# EAGLE board ESP32 Display 3.5 inch V1.2 (EAGLE 9.6.2), part 1 of 2
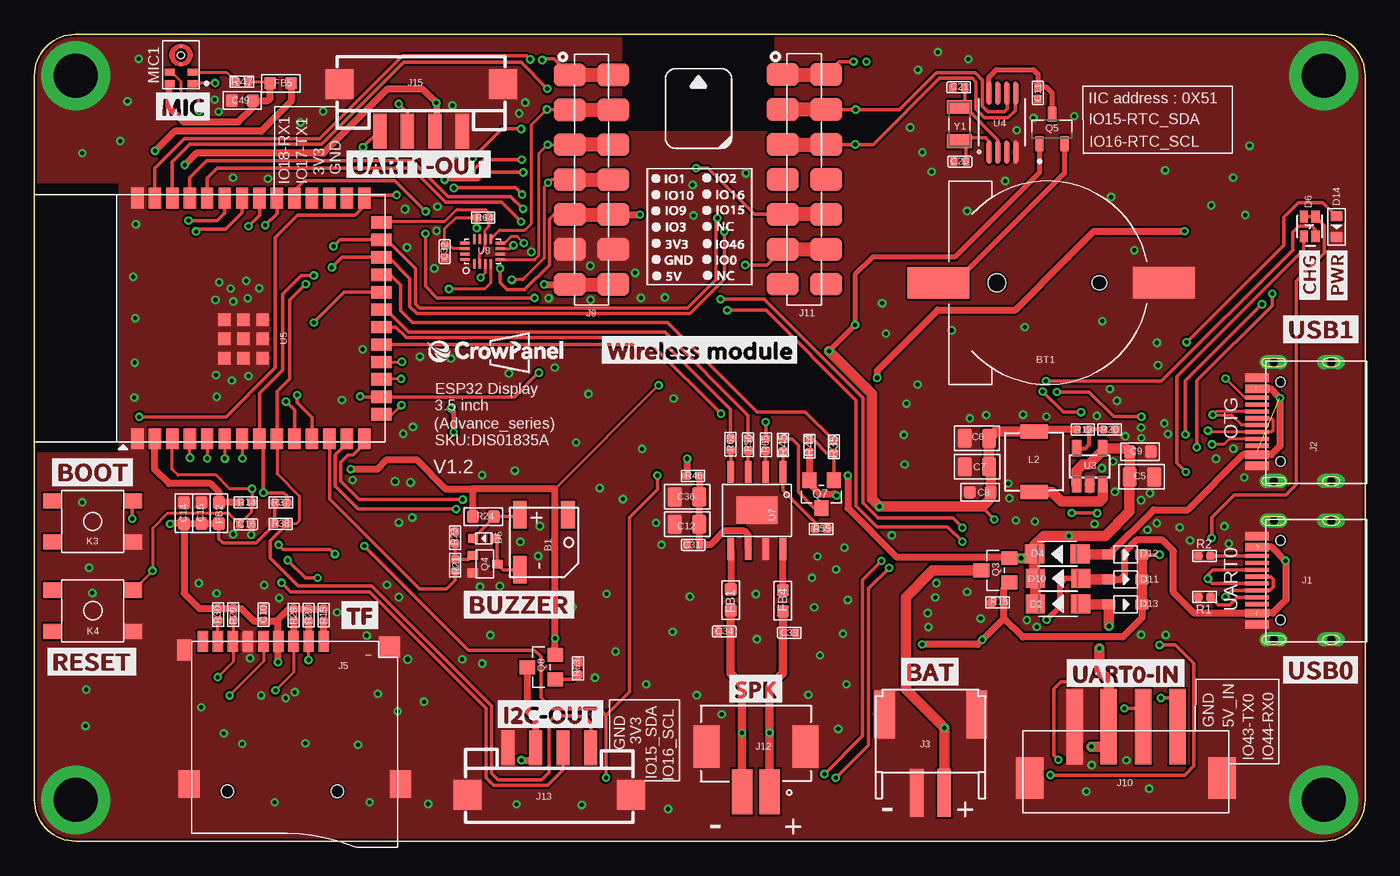
[diagram p0: board, top side]
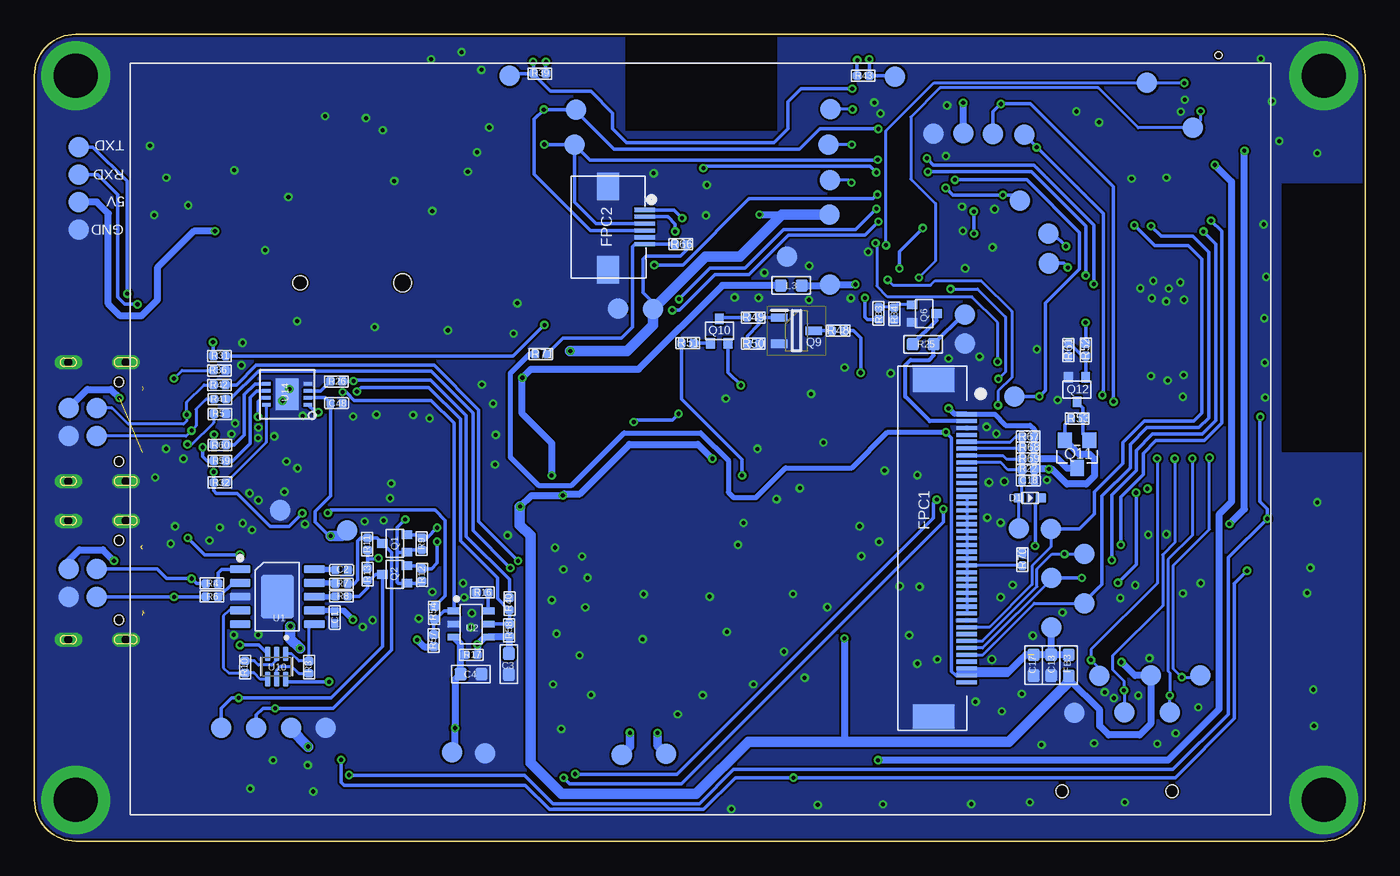
[diagram p1: board, bottom side, seen from below]

Size 96.8 x 58.7 mm. Coordinates in mm from the lower left corner, seen from the top.
Outline: 0,55.7 0,3 arc90 3,0 93.8,0 arc90 96.8,3 96.8,55.7 arc90 93.8,58.7 3,58.7 arc90 0,55.7
Copper layers (1*16): Top 0.035mm / dielectric 1.5mm / Bottom 0.035mm
Design rules "HMI_GZ *": minimum track width 8mil, minimum drill 0.3mm, track to track 6mil, track to pad 6mil, pad to pad 4mil, via to via 6mil, smd to smd 6mil, copper to edge 6mil, drill to drill 4mil, minimum pad ring 6mil, minimum via ring 6mil, stop-mask expansion 4mil, vias tented up to drill 100mil, thermal gap 0mil
tRestrict: area 0,28.3 to 6.1,47.8; area 42.8,51.7 to 53.8,58.7
bRestrict: area 0,28.3 to 6.1,47.8; area 42.8,51.7 to 53.8,58.7

## Footprints (pad centres in the part's own frame; a part is rotated, then mirrored left to right if it is on the bottom)
BEEP_5025 = smd 2 x 1: 1 -2,-1.75; 2 2,-1.75; 3 -2,1.75
CR1220 = smd 2.3 x 4.5: N 0,8.425; P 0,-7.975 | hole 1.3: 0,-3.725 | hole 1.05: 0,3.725
C0402 = smd 0.6 x 0.6: 1 -0.45,0; 2 0.45,0
C0603 = smd 0.889 x 0.889: 1 -0.762,0; 2 0.762,0
C0805 = smd 1.016 x 1.397: 1 -0.889,0; 2 0.889,0
D_SOD523 = smd 0.762 x 0.7: + -0.8,0; - 0.8,0
D_SOD123FL = smd 1.397 x 1.397: + -1.651,0; - 1.651,0
LED_KT-0603RYG = smd 0.85 x 0.6: 1 0.725,-0.425; 2 0.725,0.425; 3 -0.725,-0.425; 4 -0.725,0.425
D_SOD323 = smd 1 x 0.8: + -1.2,0; - 1.2,0
LED0603 = smd 0.762 x 0.889: + -0.762,0; - 0.762,0
L0603 = smd 0.889 x 0.889: 1 -0.762,0; 2 0.762,0
COOPER_0.5MM*40P = smd 0.3 x 1.5: P$1 -8.81,1.73; P$2 -8.31,1.73; P$3 -7.81,1.73; P$4 -7.31,1.73; P$5 -6.81,1.73; P$6 -6.31,1.73; P$7 -5.81,1.73; P$8 -5.31,1.73; P$9 -4.81,1.73; P$10 -4.31,1.73; P$11 -3.81,1.73; P$12 -3.31,1.73; P$13 -2.81,1.73; P$14 -2.31,1.73; P$15 -1.81,1.73; P$16 -1.31,1.73; P$17 -0.81,1.73; P$18 -0.31,1.73; P$19 0.19,1.73; P$20 0.69,1.73; P$21 1.19,1.73; P$22 1.69,1.73; P$23 2.19,1.73; P$24 2.69,1.73; P$25 3.19,1.73; P$26 3.69,1.73; P$27 4.19,1.73; P$28 4.69,1.73; P$29 5.19,1.73; P$30 5.69,1.73; P$31 6.19,1.73; P$32 6.69,1.73; P$33 7.19,1.73; P$34 7.69,1.73; P$35 8.19,1.73; P$36 8.69,1.73; P$37 9.19,1.73; P$38 9.69,1.73; P$39 10.19,1.73; P$40 10.69,1.73 | smd 1.8 x 3: P$41 -11.31,-0.67; P$42 13.19,-0.67
FPC-6PIN-0.5MM = smd 0.3 x 1.5: 1 -1.31,2.184; 2 -0.81,2.184; 3 -0.31,2.184; 4 0.19,2.184; 5 0.69,2.184; 6 1.19,2.184 | smd 2 x 1.6: 7 -3.01,-0.496; 8 3.036,-0.496
USB-3.0TYPEC-SMD = smd 0.3 x 1.7: A1 -3.35,0.5; A4 -2.55,0.5; A5 -1.25,0.5; A6 -0.25,0.5; A7 0.25,0.5; A8 1.25,0.5; A9 2.55,0.5; A12 3.35,0.5; B1 3.05,0.5; B4 2.25,0.5; B5 1.75,0.5; B6 0.75,0.5; B7 -0.75,0.5; B8 -1.75,0.5; B9 -2.25,0.5; B12 -3.05,0.5 | drill 0.6 pad 1.016 long: P$1 -4.325,-0.72; P$2 4.325,-0.72; P$3 -4.325,-4.9; P$4 4.325,-4.9 | hole 0.68: -2.89,-1.22; 2.89,-1.22
PH2.0WT-2PIN = smd 1 x 3.5: P$1 -1,0; P$2 1,0 | smd 1.5 x 3.5: P$3 -3.35,-5.7; P$4 3.35,-5.7
THO-M3.2*5MM-HOLE = drill 3.2 pad 5: P$1 0,0
9P-SMD-W/-RING = smd 1.524 x 0.762: 1 0,4.4; 2 0,3.3; 3 0,2.2; 4 0,1.1; 5 0,0; 6 0,-1.1; 7 0,-2.2; 8 0,-3.3; 9 0,-4.4 | smd 1.524 x 1.016: G1 0.6,-5.746 | smd 2.032 x 1.524: G2 10.373,-5.4; G3 10.373,10 | smd 1.524 x 1.524: G4 0.392,9.181 | hole 0.889: 10.9,-2.6; 10.9,5.4
H7-2.54-18.28X2.5X5MM = smd 1.65 x 2.3: 1 -7.62,-1.58; 1-1 -7.62,1.58; 2 -5.08,-1.58; 2-2 -5.08,1.58; 3 -2.54,-1.58; 3-3 -2.54,1.58; 4 0,-1.58; 4-4 0,1.58; 5 2.54,-1.58; 5-5 2.54,1.58; 6 5.08,-1.58; 6-6 5.08,1.58; 7 7.62,-1.58; 7-7 7.62,1.58
XH2.54-4P-SMD = smd 1.2 x 5.5: 1 -3.75,-1.875; 2 -1.25,-1.875; 3 1.25,-1.875; 4 3.75,-1.875 | smd 2 x 3: 5 -7,1.875; 6 7,1.875
CONN-TH_2P-P2.00_XUNPU_WAFER-PH2.0-2PLB = smd 1.5 x 3.3: 1 -1,1.65; 2 1,1.65 | smd 1.9 x 3.1: 3 3.6,-1.65; 4 -3.6,-1.65
CONNECTOR_4P-SMD-2.0 = smd 0.965 x 2.54: 1 -3,0; 2 -1,0; 3 1,0; 4 3,0 | smd 2.032 x 2.184: SS1 -5.946,3.4; SS2 5.946,3.4
TEST-PIN-4-2.0MM = smd 1.5 x 1.5: 1 -3,0; 2 -1,0; 3 1,0; 4 3,0
KEY-4.5X4.5-SMD = smd 1.35 x 1.1: 1 -2.925,1.5; 2 -2.925,-1.5; 3 2.925,-1.5; 4 2.925,1.5
L0420 = smd 2 x 1: 1 0,2.2; 2 0,-2.2
MIC-SMD_5P-L3.5-W2.7-P1.67 = smd 0.725 x 0.522: 1 -0.838,1.362; 2 -0.838,0.542; 3 0.838,0.542; 4 0.838,1.362 | smd 0.25 x 0.25: 5_1 0,-0.048; 5_2 0,-1.373 | hole 0.5: 0,-0.71
TEST_PAD-1.5MM = smd 1.5 x 1.5: P$1 0,0
MOS_SOT323 = smd 0.635 x 0.762: 1 -0.635,-0.889; 2 0.635,-0.889; 3 0,0.889
PMOS_SOT23 = smd 1.016 x 1.143: 1 -0.889,-1.016; 2 0.889,-1.016; 3 0,1.016
SOT-23 = smd 1.09 x 0.61: 1 -1.07,0.915; 2 -1.07,-0.915; 3 1.07,0
SOT95P280X125-3N = smd 1.2 x 0.6: 1 -1.25,0.95; 2 -1.25,-0.95; 3 1.25,0
R0402 = smd 0.635 x 0.635: 1 -0.445,0; 2 0.445,0
R0603-SP = smd 0.889 x 0.889: 1 -0.762,0; 2 0.762,0
ESOP-10-EP-150MIL = smd 1.5 x 0.6: 1 -2.7,2; 2 -2.7,1; 3 -2.7,0; 4 -2.7,-1; 5 -2.7,-2; 6 2.7,-2; 7 2.7,-1; 8 2.7,0; 9 2.7,1; 10 2.7,2 | smd 2.4 x 3.2: EP 0,0
SOT23-6L = smd 0.5 x 0.9: 1 -0.961,-1.212; 2 -0.011,-1.212; 3 0.94,-1.212; 4 0.94,1.288; 5 -0.011,1.288; 6 -0.961,1.288
IC_SOT23-5 = smd 0.69 x 1.2: 1 -0.95,-1.3; 2 0,-1.3; 3 0.95,-1.3; 4 0.95,1.3; 5 -0.95,1.3
MSOP-8 = smd 0.364 x 1.692: 1 -0.975,-2.146; 2 -0.325,-2.146; 3 0.325,-2.146; 4 0.975,-2.146; 5 0.975,2.146; 6 0.325,2.146; 7 -0.325,2.146; 8 -0.975,2.146
ESP32-S3-WROOM-1-SMD41 = smd 1.5 x 0.9: 1 -8.75,5.26; 2 -8.75,3.99; 3 -8.75,2.72; 4 -8.75,1.45; 5 -8.75,0.18; 6 -8.75,-1.09; 7 -8.75,-2.36; 8 -8.75,-3.63; 9 -8.75,-4.9; 10 -8.75,-6.17; 11 -8.75,-7.44; 12 -8.75,-8.71; 13 -8.75,-9.98; 14 -8.75,-11.25; 27 8.75,-11.25; 28 8.75,-9.98; 29 8.75,-8.71; 30 8.75,-7.44; 31 8.75,-6.17; 32 8.75,-4.9; 33 8.75,-3.63; 34 8.75,-2.36; 35 8.75,-1.09; 36 8.75,0.18; 37 8.75,1.45; 38 8.75,2.72; 39 8.75,3.99; 40 8.75,5.26 | smd 0.9 x 1.5: 15 -6.985,-12.5; 16 -5.715,-12.5; 17 -4.445,-12.5; 18 -3.175,-12.5; 19 -1.905,-12.5; 20 -0.635,-12.5; 21 0.635,-12.5; 22 1.905,-12.5; 23 3.175,-12.5; 24 4.445,-12.5; 25 5.715,-12.5; 26 6.985,-12.5 | smd 0.9 x 0.9: 41 -2.9,-1.06; 42 -1.5,-1.06; 43 -0.1,-1.06; 44 -2.9,-2.46; 45 -1.5,-2.46; 46 -0.1,-2.46; 47 -2.9,-3.86; 48 -1.5,-3.86; 49 -0.1,-3.86
NS4168-ESOP-8 = smd 1.6 x 0.5: 1 -2.8,1.905; 2 -2.8,0.635; 3 -2.8,-0.635; 4 -2.8,-1.905; 5 2.8,-1.905; 6 2.8,-0.635; 7 2.8,0.635; 8 2.8,1.905 | smd 2 x 3: 9 0,0
IC_SGM3799_TQFN2.6X1.8_16L = smd 0.2 x 0.7: 1 -0.6,-0.9; 2 -0.2,-0.9; 3 0.2,-0.9; 4 0.6,-0.9; 9 0.6,0.9; 10 0.2,0.9; 11 -0.2,0.9; 12 -0.6,0.9 | smd 0.7 x 0.2: 5 1.3,-0.6; 6 1.3,-0.2; 7 1.3,0.2; 8 1.3,0.6; 13 -1.3,0.6; 14 -1.3,0.2; 15 -1.3,-0.2; 16 -1.3,-0.6
SOP65P210X100-6N = smd 1.09 x 0.4: 1 -0.92,0.65; 2 -0.92,0; 3 -0.92,-0.65; 4 0.92,-0.65; 5 0.92,0; 6 0.92,0.65
DFN8 = smd 0.61 x 0.25: 1 -1.5,0.75; 2 -1.5,0.25; 3 -1.5,-0.25; 4 -1.5,-0.75; 5 1.5,-0.75; 6 1.5,-0.25; 7 1.5,0.25; 8 1.5,0.75 | smd 1.7 x 2.3: P$9 0,0
SMD3215-2P = smd 1 x 1.8: 1 -1.25,0; 2 1.25,0

## Placement (x,y rotation side)
B1  BEEP_5025  [BEEP_5025]  37.07,21.74 270 top
BT1  CR1220  [CR1220]  73.73,40.63 270 top
C1  1uF  [C0402]  74.95,16.27 90 bottom
C2  1uF  [C0402]  74.45,19.73 180 bottom
C3  1uF/0603  [C0603]  62.29,12.88 90 bottom
C4  10uF/0603  [C0603]  65.04,12.16 180 bottom
C5  22uF/0805  [C0805]  80.55,26.5 180 top
C6  22uF/0805  [C0805]  68.56,29.31 0 top
C7  22uF/0805  [C0805]  68.57,27.24 0 top
C8  1uF/0603  [C0603]  68.8,25.38 0 top
C9  1uF/0603  [C0603]  80.44,28.33 180 top
C10  1uF  [C0402]  16.67,16.47 270 top
C11  1uF  [C0402]  73,54.43 270 top
C12  47uF/0805  [C0805]  47.48,23.06 180 top
C13  4.7uF  [C0603]  22.84,12.8 90 bottom
C14  10uF/0603  [C0603]  10.88,23.86 270 top
C15  100nF/0603  [C0603]  12.16,23.86 270 top
C16  1uF  [C0402]  15.38,23.06 180 top
C17  100nF  [C0603]  24.11,12.8 90 bottom
C18  1uF  [C0402]  24.5,26.23 180 bottom
C20  18pF  [C0402]  67.32,49.45 0 top
C21  18pF  [C0402]  67.24,54.84 180 top
C31  100nF  [C0402]  47.93,21.57 180 top
C32  1uF  [C0402]  29.85,42.89 90 top
C33  1nF  [C0402]  54.92,15.16 180 top
C34  1nF  [C0402]  50.19,15.25 0 top
C36  47uF/0805  [C0805]  47.48,25.05 180 top
C48  1uF  [C0402]  74.81,31.86 180 bottom
C49  100nF  [C0603]  15.12,53.88 0 top
D1  B5819WT  [D_SOD523]  24.38,24.97 0 bottom
D2  DSS34  [D_SOD123FL]  74.46,17.27 180 top
D4  DSS34  [D_SOD123FL]  74.41,20.89 180 top
D5  B5819WT  [D_SOD523]  32.71,22.03 180 top
D6  KT-0603RYG  [LED_KT-0603RYG]  92.76,44.72 90 top
D10  DSS34  [D_SOD123FL]  74.47,19.11 180 top
D11  1N5817WS  [D_SOD323]  79.37,19.05 0 top
D12  1N5817WS  [D_SOD323]  79.37,20.86 0 top
D13  1N5817WS  [D_SOD323]  79.37,17.22 0 top
D14  Red  [LED0603]  94.73,44.7 270 top
FB1  1K/300mA  [L0603]  50.65,17.55 270 top
FB2  0R/800mA  [L0603]  13.43,23.86 90 top
FB3  0R/800mA  [L0603]  21.56,12.8 90 bottom
FB4  1K/300mA  [L0603]  54.45,17.49 270 top
FB5  0R/800mA  [L0603]  17.92,55.14 180 top
FPC1  3.5-TFT-FPC-40PIN-0.5MM  [COOPER_0.5MM*40P]  30.71,22.25 270 bottom
FPC2  FPC-6PIN-0.5MM  [FPC-6PIN-0.5MM]  54.58,44.62 270 bottom
J1  TYPEC-3.0-16P-SMD  [USB-3.0TYPEC-SMD]  89.43,18.99 90 top
J2  TYPEC-3.0-16P-SMD  [USB-3.0TYPEC-SMD]  89.43,30.52 90 top
J3  PH2.0WT-2PIN  [PH2.0WT-2PIN]  65.18,3.52 180 top
J4  THO-M3.25MM-HOLE  [THO-M3.2*5MM-HOLE]  3,3 0 top
J5  [9P-SMD-W/-RING]  16.65,14.53 270 top
J6  THO-M3.25MM-HOLE  [THO-M3.2*5MM-HOLE]  3,55.7 0 top
J7  THO-M3.25MM-HOLE  [THO-M3.2*5MM-HOLE]  93.8,3 0 top
J8  THO-M3.25MM-HOLE  [THO-M3.2*5MM-HOLE]  93.8,55.7 0 top
J9  [H7-2.54-18.28X2.5X5MM]  40.53,48.13 270 top
J10  XH2.54-4P-SMT  [XH2.54-4P-SMD]  79.4,6.46 180 top
J11  [H7-2.54-18.28X2.5X5MM]  56.01,48.15 270 top
J12  WAFER-PH2.0-2PLB  [CONN-TH_2P-P2.00_XUNPU_WAFER-PH2.0-2PLB]  52.49,5.24 180 top
J13  HY2.0-4P-SMT  [CONNECTOR_4P-SMD-2.0]  37.46,6.79 180 top
J14  HC-PZ200-8.7L-1X4PZ1  [TEST-PIN-4-2.0MM]  93.59,47.5 270 bottom
J15  HY2.0-4P-SMT  [CONNECTOR_4P-SMD-2.0]  28.14,51.66 0 top
K3  KEY-4.5X4.5  [KEY-4.5X4.5-SMD]  4.24,23.26 180 top
K4  KEY-4.5X4.5  [KEY-4.5X4.5-SMD]  4.25,16.76 180 top
L2  4.7uH/3A  [L0420]  72.73,27.61 180 top
L3  NC  [L0603]  41.74,40.43 180 bottom
MIC1  LMD3526B261-OFA01  [MIC-SMD_5P-L3.5-W2.7-P1.67]  10.67,56.48 180 top
P1  TEST_PADPAD-1.5MM  [TEST_PAD-1.5MM]  94.31,19.81 0 bottom
P2  TEST_PADPAD-1.5MM  [TEST_PAD-1.5MM]  92.27,19.81 0 bottom
P3  TEST_PADPAD-1.5MM  [TEST_PAD-1.5MM]  92.27,17.78 0 bottom
P4  TEST_PADPAD-1.5MM  [TEST_PAD-1.5MM]  94.31,17.78 0 bottom
P5  TEST_PADPAD-1.5MM  [TEST_PAD-1.5MM]  94.31,31.51 0 bottom
P6  TEST_PADPAD-1.5MM  [TEST_PAD-1.5MM]  92.27,29.48 0 bottom
P7  TEST_PADPAD-1.5MM  [TEST_PAD-1.5MM]  92.27,31.51 0 bottom
P8  TEST_PADPAD-1.5MM  [TEST_PAD-1.5MM]  94.31,29.48 0 bottom
P9  TEST_PADPAD-1.5MM  [TEST_PAD-1.5MM]  66.42,6.47 0 bottom
P10  TEST_PADPAD-1.5MM  [TEST_PAD-1.5MM]  64.02,6.38 0 bottom
P11  TEST_PADPAD-1.5MM  [TEST_PAD-1.5MM]  74.06,22.6 270 bottom
P12  TEST_PADPAD-1.5MM  [TEST_PAD-1.5MM]  78.92,24.08 270 bottom
P13  TEST_PADPAD-1.5MM  [TEST_PAD-1.5MM]  15.59,12.05 0 bottom
P15  TEST_PADPAD-1.5MM  [TEST_PAD-1.5MM]  19.34,12.04 0 bottom
P16  TEST_PADPAD-1.5MM  [TEST_PAD-1.5MM]  17.51,9.37 0 bottom
P17  TEST_PADPAD-1.5MM  [TEST_PAD-1.5MM]  78.13,8.25 0 bottom
P18  TEST_PADPAD-1.5MM  [TEST_PAD-1.5MM]  75.61,8.25 0 bottom
P19  TEST_PADPAD-1.5MM  [TEST_PAD-1.5MM]  80.65,8.25 0 bottom
P20  TEST_PADPAD-1.5MM  [TEST_PAD-1.5MM]  83.2,8.25 0 bottom
P21  TEST_PADPAD-1.5MM  [TEST_PAD-1.5MM]  38.94,48.09 180 bottom
P22  TEST_PADPAD-1.5MM  [TEST_PAD-1.5MM]  39.03,50.67 180 bottom
P23  TEST_PADPAD-1.5MM  [TEST_PAD-1.5MM]  38.89,53.27 180 bottom
P24  TEST_PADPAD-1.5MM  [TEST_PAD-1.5MM]  15.87,55.17 180 bottom
P25  TEST_PADPAD-1.5MM  [TEST_PAD-1.5MM]  14.21,9.37 0 bottom
P26  TEST_PADPAD-1.5MM  [TEST_PAD-1.5MM]  12,12.05 0 bottom
P27  TEST_PADPAD-1.5MM  [TEST_PAD-1.5MM]  12.52,51.9 180 bottom
P28  TEST_PADPAD-1.5MM  [TEST_PAD-1.5MM]  21.15,9.35 0 bottom
P30  TEST_PADPAD-1.5MM  [TEST_PAD-1.5MM]  54.07,6.27 90 bottom
P31  TEST_PADPAD-1.5MM  [TEST_PAD-1.5MM]  25.1,46.6 180 bottom
P32  TEST_PADPAD-1.5MM  [TEST_PAD-1.5MM]  25.53,32.36 180 bottom
P38  TEST_PADPAD-1.5MM  [TEST_PAD-1.5MM]  51.79,38.73 0 bottom
P39  TEST_PADPAD-1.5MM  [TEST_PAD-1.5MM]  57.51,50.67 0 bottom
P40  TEST_PADPAD-1.5MM  [TEST_PAD-1.5MM]  57.41,53.23 0 bottom
P41  TEST_PADPAD-1.5MM  [TEST_PAD-1.5MM]  54.34,38.75 0 bottom
P42  TEST_PADPAD-1.5MM  [TEST_PAD-1.5MM]  50.85,6.35 90 bottom
P44  TEST_PADPAD-1.5MM  [TEST_PAD-1.5MM]  29.23,51.5 0 bottom
P45  TEST_PADPAD-1.5MM  [TEST_PAD-1.5MM]  31.39,51.47 0 bottom
P46  TEST_PADPAD-1.5MM  [TEST_PAD-1.5MM]  27.06,51.46 0 bottom
P47  TEST_PADPAD-1.5MM  [TEST_PAD-1.5MM]  24.79,51.39 0 bottom
P49  TEST_PADPAD-1.5MM  [TEST_PAD-1.5MM]  25.2,22.74 0 bottom
P50  TEST_PADPAD-1.5MM  [TEST_PAD-1.5MM]  20.43,20.89 180 bottom
P51  TEST_PADPAD-1.5MM  [TEST_PAD-1.5MM]  22.83,19.16 180 bottom
P52  TEST_PADPAD-1.5MM  [TEST_PAD-1.5MM]  20.42,17.3 180 bottom
P53  TEST_PADPAD-1.5MM  [TEST_PAD-1.5MM]  22.86,22.73 180 bottom
P55  TEST_PADPAD-1.5MM  [TEST_PAD-1.5MM]  22.83,15.55 180 bottom
P56  TEST_PADPAD-1.5MM  [TEST_PAD-1.5MM]  29.1,38.31 180 bottom
P57  TEST_PADPAD-1.5MM  [TEST_PAD-1.5MM]  29.11,36.19 0 bottom
P58  TEST_PADPAD-1.5MM  [TEST_PAD-1.5MM]  62.23,55.68 0 bottom
P59  TEST_PADPAD-1.5MM  [TEST_PAD-1.5MM]  34.2,55.62 0 bottom
P60  TEST_PADPAD-1.5MM  [TEST_PAD-1.5MM]  42.06,42.54 0 bottom
P61  TEST_PADPAD-1.5MM  [TEST_PAD-1.5MM]  38.96,45.59 0 bottom
P62  TEST_PADPAD-1.5MM  [TEST_PAD-1.5MM]  38.93,40.5 0 bottom
P63  TEST_PADPAD-1.5MM  [TEST_PAD-1.5MM]  23.02,42.04 0 bottom
P64  TEST_PADPAD-1.5MM  [TEST_PAD-1.5MM]  23.04,44.22 0 bottom
Q1  BSS138W_SOT323  [MOS_SOT323]  70.58,21.66 90 bottom
Q2  BSS138W_SOT323  [MOS_SOT323]  70.58,19.4 90 bottom
Q3  AO3401  [PMOS_SOT23]  69.91,19.7 90 top
Q4  SS8050W-SOT323  [MOS_SOT323]  32.77,20.16 270 top
Q5  BAT54C-7-F  [SOT-23]  74.02,51.81 90 top
Q6  SS8050W-SOT323  [MOS_SOT323]  32.07,38.39 270 bottom
Q7  AO3401  [PMOS_SOT23]  57.26,25.24 180 top
Q8  AO3401  [PMOS_SOT23]  36.87,12.66 90 top
Q9  AO3400A  [SOT95P280X125-3N]  41.36,37.14 0 bottom
Q10  SS8550W-SOT323  [MOS_SOT323]  46.98,37.12 0 bottom
Q11  AO3401//NC  [PMOS_SOT23]  20.95,28.16 180 bottom
Q12  SS8050W-SOT323//NC  [MOS_SOT323]  20.96,32.86 180 bottom
R1  5.1K  [R0402]  85.11,17.76 180 top
R2  5.1K  [R0402]  85.11,20.75 0 top
R3  10K  [R0402]  76.83,12.66 90 bottom
R4  0R  [R0402]  83.89,18.74 180 bottom
R5  5.1K  [R0402]  83.31,31.09 180 bottom
R6  0R  [R0402]  83.89,17.79 180 bottom
R7  0R  [R0402]  74.46,18.73 180 bottom
R8  0R  [R0402]  74.46,17.81 180 bottom
R9  4.7k  [R0402]  68.62,21.63 270 bottom
R10  10K  [R0402]  81.48,12.68 270 bottom
R11  4.7k  [R0402]  72.58,21.62 270 bottom
R12  4.7k  [R0402]  68.61,19.37 270 bottom
R13  4.7k  [R0402]  72.57,19.42 90 bottom
R14  10K  [R0402]  15.37,24.64 180 top
R15  10K  [R0402]  21.04,16.45 90 top
R16  2K  [R0402]  64.21,18.09 0 bottom
R17  5.1K  [R0402]  65.02,13.55 0 bottom
R18  10K  [R0402]  70.08,17.36 0 top
R19  45.3K  [R0402]  76.27,29.95 180 top
R20  10K  [R0402]  78.2,29.95 180 top
R21  1K  [R0402]  30.62,20.07 270 top
R22  10K  [R0402]  24.5,27.02 0 bottom
R23  47K  [R0402]  30.6,22.09 90 top
R24  3.9R/0603  [R0603-SP]  32.66,23.61 180 top
R25  1.3R/0603  [R0603-SP]  32.15,36.16 0 bottom
R26  2K  [R0402]  74.83,33.46 0 bottom
R27  10K  [R0402]  19.94,16.45 90 top
R28  10K  [R0402]  18.86,16.45 90 top
R29  10K  [R0402]  14.46,16.48 90 top
R30  10K  [R0402]  13.36,16.48 90 top
R31  5.1K  [R0402]  83.33,35.3 0 bottom
R32  5.1K  [R0402]  83.3,26.1 180 bottom
R33  1K  [R0402]  35.39,38.4 270 bottom
R34  47K  [R0402]  34.25,38.38 270 bottom
R35  100R  [R0402]  58.15,28.69 270 top
R36  5.1K  [R0402]  83.34,34.26 0 bottom
R37  4.7k  [R0402]  17.94,24.64 180 top
R38  4.7k  [R0402]  17.92,23.1 180 top
R39  0R  [R0402]  60.04,55.85 180 bottom
R40  NC  [R0402]  62.25,17.27 90 bottom
R41  0R  [R0402]  83.3,32.17 180 bottom
R42  0R  [R0402]  83.34,33.2 180 bottom
R43  0R  [R0402]  36.51,55.69 0 bottom
R44  10K  [R0402]  56.38,28.74 270 top
R45  1K  [R0402]  54.47,28.82 270 top
R46  0R  [R0402]  47.91,26.57 0 top
R47  10K/NC  [R0402]  15.11,55.25 0 top
R48  100R  [R0402]  38.34,37.14 0 bottom
R49  100R  [R0402]  44.52,38.1 180 bottom
R50  10K  [R0402]  44.5,36.19 0 bottom
R51  10K  [R0402]  49.28,36.23 0 bottom
R52  1K/NC  [R0402]  20.33,35.75 90 bottom
R53  100K/NC  [R0402]  20.96,30.76 180 bottom
R54  NC  [R0402]  67.72,16.61 90 bottom
R55  100k  [R0402]  57.23,22.73 0 top
R56  0R  [R0402]  51.92,28.85 90 top
R57  5.1K  [R0402]  67.75,14.59 90 bottom
R58  5.1K  [R0402]  62.26,15.34 90 bottom
R59  0R  [R0402]  83.3,27.68 0 bottom
R60  0R  [R0402]  83.3,28.83 0 bottom
R61  47K/NC  [R0402]  21.59,35.73 270 bottom
R62  0R  [R0402]  50.65,28.87 90 top
R63  10K  [R0402]  39.55,12.57 270 top
R64  10K/NC  [R0402]  32.64,45.36 180 top
R65  0R  [R0402]  53.2,28.85 90 top
R66  0R/NC  [R0402]  49.78,43.43 0 bottom
R67  10K  [R0402]  24.51,29.43 0 bottom
R68  10K  [R0402]  24.51,28.63 0 bottom
R69  10K  [R0402]  24.51,27.83 0 bottom
R70  NC/0R  [R0402]  24.93,20.49 90 bottom
R71  0R  [R0402]  59.95,35.44 180 bottom
U1  CH340K  [ESOP-10-EP-150MIL]  79.14,17.78 0 bottom
U2  TP4059-SOT23-6  [SOT23-6L]  65.07,15.78 270 bottom
U3  RY3420  [IC_SOT23-5]  76.76,27.27 0 top
U4  PCF8563  [MSOP-8]  70.41,52.27 0 top
U5  ESP32-S3-WROOM-1  [ESP32-S3-WROOM-1-SMD41]  12.75,38.04 90 top
U7  NS4168-ESOP-8  [NS4168-ESOP-8]  52.56,24.07 270 top
U8  SGM3799  [IC_SGM3799_TQFN2.6X1.8_16L]  32.6,42.91 0 top
U10  UMH3NTN  [SOP65P210X100-6N]  79.17,12.7 270 bottom
U14  STC8G1K08  [DFN8]  78.41,32.52 180 bottom
Y1  32.768KHZ  [SMD3215-2P]  67.29,52.17 90 top

## Library data of the parts
B1 C1-C18 C20 C21 C31-C34 C36 C48 C49 D1 D2 D4 D5 D10-D14 FB1-FB5 FPC2 J1-J13 J15 K3 K4 L2 L3 P1-P13 P15-P28 P30-P32 P38-P42 P44-P47 P49-P53 P55-P64 Q1-Q4 Q6-Q8 Q10-Q12 R1-R71 U2 U3 U5 = CrowPanel_Advance_HMI
BT1 = CR1220; AVAILABILITY: In Stock; CHECK_PRICES: https://www.snapeda.com/parts/S8411-45R/Harwin+Inc./view-part/?ref=eda; DESCRIPTION: Coin Cell Battery Retainer, Horizontal SMT, for CR1220 Coin Cell Batteries, Tape & Reeled; MF: Harwin; MP: S8411-45R; PACKAGE: None; PRICE: None; PURCHASE-URL: https://www.snapeda.com/api/url_track_click_mouser/?unipart_id=424412&manufacturer=Harwin&part_name=S8411-45R&search_term=cr1220; SNAPEDA_LINK: https://www.snapeda.com/parts/S8411-45R/Harwin+Inc./view-part/?ref=snap
D6 = KT-0603RYG
FPC1 = CrowPanel_Advice_HMI 4.3
J14 = Mini PC Case
MIC1 = MMICT5838-00-012
Q5 = BAT54C-7-F
Q9 = AO3400A; ARROW_PART_NUMBER: AO3400A; ARROW_PRICE-STOCK: https://www.arrow.com/en/products/ao3400a/alpha-and-omega-semiconductor?utm_currency=USD&region=nac; DESCRIPTION: 30V N-Channel MOSFET; HEIGHT: 1.25mm; MANUFACTURER_NAME: Alpha & Omega Semiconductors; MANUFACTURER_PART_NUMBER: AO3400A
U1 = sale
U4 = BM8563
U7 = STC_MCUSTC8G1K08A
U8 = cooper
U10 = UMH3NTN; AVAILABILITY: In Stock; CHECK_PRICES: https://www.snapeda.com/parts/UMH3NTN/Rohm/view-part/?ref=eda; DESCRIPTION: Pre-Biased Bipolar Transistor (BJT) 2 NPN - Pre-Biased (Dual) 50V 100mA 250MHz 150mW Surface Mount UMT6; MF: Rohm; MP: UMH3NTN; PACKAGE: SOT-363 Rohm; PRICE: None; PURCHASE-URL: https://www.snapeda.com/api/url_track_click_mouser/?unipart_id=355768&manufacturer=Rohm&part_name=UMH3NTN&search_term=umh3n; SNAPEDA_LINK: https://www.snapeda.com/parts/UMH3NTN/Rohm/view-part/?ref=snap
U14 = DFN8
Y1 = Crystal; AVAILABILITY: In Stock; CHECK_PRICES: https://www.snapeda.com/parts/CM7V-T1A-32.768kHz-12.5pF-100PPM-TB-QC/Micro+Crystal/view-part/?ref=eda; DESCRIPTION: Tuning Fork Crystal 32.768kHz in SMD 1.5 x 3.2 mm package; MF: Micro Crystal; MP: CM7V-T1A-32.768kHz-12.5pF-100PPM-TB-QC; PACKAGE: SMD-2 Micro Crystal; PRICE: None; PURCHASE-URL: https://www.snapeda.com/api/url_track_click_mouser/?unipart_id=4216772&manufacturer=Micro Crystal&part_name=CM7V-T1A-32.768kHz-12.5pF-100PPM-TB-QC&search_term=crystal; SNAPEDA_LINK: https://www.snapeda.com/parts/CM7V-T1A-32.768kHz-12.5pF-100PPM-TB-QC/Micro+Crystal/view-part/?ref=snap

## Nets
3V3: C6.2 C7.2 C8.2 C10.2 C14.2 C15.2 C32.2 FB2.1 FB3.1 FB5.1 J5.4 J9.5 J9.5-5 L2.2 P13.P$1 P38.P$1 P61.P$1 Q1.1 Q2.1 Q5.1 Q7.2 Q8.2 Q10.2 Q11.2 R9.2 R12.2 R15.2 R19.2 R22.2 R24.2 R27.2 R28.2 R29.2 R30.2 R31.2 R37.2 R38.2 R44.2 R46.1 R53.2 R64.2 R66.2 U8.14
3V3_1: C49.2 FB5.2 MIC1.4 R47.2
3V3_OUT: J13.3 J15.3 P44.P$1 Q8.3
+5V_IN: D2.+ D13.+ J10.3 P17.P$1
+VBUS1: C1.2 D10.+ D11.+ J1.A4 J1.A9 J1.B4 J1.B9 P1.P$1 U1.7
+VBUS2: D4.+ D12.+ J2.A4 J2.A9 J2.B4 J2.B9 P5.P$1
+VC_IN: C3.2 D6.1 D6.2 D11.- D12.- D13.- Q3.1 R17.2 R18.2 R57.1 R58.1 U2.4
C_LED: R32.1 U14.8
CH_EN: C16.2 D1.- K4.2 R14.1 R51.1 U5.3 U10.6
CHRG: R54.1 R57.2 U2.1 U14.7
D_LED: R26.1 U14.3
DA1: J5.8 R30.1
DA2: J5.1 R15.1
DONE: R40.1 R58.2 U2.5 U14.1
DTR: R10.2 U1.4 U10.4
ESP_3V3: FB2.2 R14.2 U5.2
ESP_D+: R42.1 U5.14
ESP_D-: R41.1 U5.13
ESP_RXD0: Q2.2 R12.1 U5.36
ESP_TXD0: Q1.2 R9.1 U5.37
GND: BT1.N C1.1 C2.1 C3.1 C4.1 C5.1 C6.1 C7.1 C8.1 C9.1 C10.1 C11.2 C12.2 C13.1 C14.1 C15.1 C16.1 C17.1 C18.1 C20.1 C21.2 C31.2 C32.1 C33.1 C34.1 C36.2 C48.1 C49.1 D14.- FPC1.P$3 FPC1.P$31 FPC1.P$41 FPC1.P$42 FPC2.5 FPC2.7 FPC2.8 J1.A1 J1.A12 J1.B1 J1.B12 J1.P$1 J1.P$2 J1.P$3 J1.P$4 J2.A1 J2.A12 J2.B1 J2.B12 J2.P$1 J2.P$2 J2.P$3 J2.P$4 J3.P$2 J3.P$3 J3.P$4 J4.P$1 J5.6 J5.G1 J5.G2 J5.G3 J5.G4 J6.P$1 J7.P$1 J8.P$1 J9.6 J9.6-6 J10.4 J10.5 J10.6 J12.3 J12.4 J13.4 J13.SS1 J13.SS2 J14.4 J15.4 J15.SS1 J15.SS2 K3.1 K4.1 MIC1.5_1 MIC1.5_2 P4.P$1 P8.P$1 P10.P$1 P12.P$1 P18.P$1 P28.P$1 P41.P$1 P45.P$1 P57.P$1 P60.P$1 Q4.2 Q6.2 Q9.2 Q12.2 R1.2 R2.1 R5.1 R16.1 R18.1 R20.1 R23.2 R34.2 R36.2 R50.2 R55.2 R61.2 R63.1 R70.2 U1.3 U1.EP U2.2 U3.2 U4.4 U5.1 U5.40 U5.41 U5.42 U5.43 U5.44 U5.45 U5.46 U5.47 U5.48 U5.49 U7.7 U7.9 U8.6 U14.4 U14.P$9
IO0_BOOT_BUSY: J11.6 J11.6-6 K3.2 P31.P$1 U5.27 U10.3
IO1_ESP_TXD2: P59.P$1 R43.2 U5.39
IO2_ESP_RXD2: P58.P$1 R39.2 U5.38
IO3_W_MOSI: J9.4 J9.4-4 P21.P$1 U5.15
IO4_SD_MISO: J5.7 P26.P$1 R29.1 U5.4
IO5_SD_SCK: J5.5 P25.P$1 U5.5
IO6_SD_MOSI: J5.3 P16.P$1 R28.1 U5.6
IO7_SD_CS: J5.2 P15.P$1 R27.1 U5.7
IO8_BEEP: R21.2 U5.12
IO9: U5.17 U8.4
IO9_MIC_CLK: MIC1.3 P27.P$1 U8.3
IO9_W_MISO: J9.3 J9.3-3 P22.P$1 U8.5
IO10: U5.18 U8.8
IO10_MIC_SD: MIC1.1 P24.P$1 U8.7
IO10_W_CLK: J9.2 J9.2-2 P23.P$1 U8.9
IO11_I2S_LRCLK: R65.2 U5.19
IO12_I2S_SDIN: R62.2 U5.20
IO13_I2S_BCLK: R56.2 U5.21
IO14_TFT_PWR: R52.2 U5.22
IO15_SDA: FPC2.3 J11.3 J11.3-3 J13.2 P39.P$1 R37.1 U4.5 U5.8
IO16_SCL: FPC2.4 J11.2 J11.2-2 J13.1 P40.P$1 R38.1 U4.6 U5.9
IO17_ESP_TXD1: J15.2 P46.P$1 U5.10
IO18_ESP_RXD1: J15.1 P47.P$1 U5.11
IO21_NS_CTRL: R35.1 U5.23
IO38_LED_BK: R33.2 U5.31
IO39_TFT_SDA: FPC1.P$32 P53.P$1 U5.32
IO40_TFT_CS: FPC1.P$36 P52.P$1 U5.33
IO41_TFT_RS: FPC1.P$35 P51.P$1 U5.34
IO42_TFT_SCK: FPC1.P$34 P50.P$1 U5.35
IO45_SPISW_ITCHING: R64.1 U5.26 U8.2 U8.10
IO46_W_CS: J11.5 J11.5-5 P32.P$1 R48.2 U5.16
IO47_TP_INT: FPC2.2 P63.P$1 U5.24
IO48_TP_RST: FPC2.1 P64.P$1 U5.25
IOT_5V: J9.7 J9.7-7 L3.1 P62.P$1
LCD_LEDK: FPC1.P$2 P56.P$1 R25.2
N$1: J1.A5 R1.1
N$2: Q7.1 R35.2 R44.1
N$3: J2.B5 R36.1
N$4: J2.A5 R5.2
N$5: R4.1 U1.1
N$6: R6.1 U1.2
N$7: R10.1 U10.2
N$8: R3.1 U10.5
N$9: C2.2 U1.10
N$10: R7.2 U1.9
N$11: R8.2 U1.8
N$12: R16.2 U2.6
N$13: L2.1 U3.3
N$14: Q4.1 R21.1 R23.1
N$15: B1.2 D5.+ Q4.3
N$16: B1.1 D5.- R24.1
N$17: MIC1.2 R47.1
N$18: BT1.P Q5.2
N$19: R59.2 U14.6
N$20: R60.2 U14.5
N$21: D14.+ R31.1
N$22: Q6.3 R25.1
N$23: J9.1 J9.1-1 R43.1
N$24: J11.1 J11.1-1 R39.1
N$25: C11.1 Q5.3 U4.8
N$26: C21.1 U4.2 Y1.2
N$27: Q8.1 R63.2
N$28: Q9.1 R49.1 R50.1
N$29: Q6.1 R33.1 R34.1
N$30: C20.2 U4.1 Y1.1
N$31: R19.1 R20.2 U3.5
N$32: Q10.3 R49.2
N$33: FPC1.P$5 R67.1
N$34: Q10.1 R51.2
N$35: Q11.1 Q12.3 R53.1
N$36: Q12.1 R52.1 R61.1
N$37: FPC2.6 R66.1 R71.1
N$39: R65.1 U7.2
N$40: D6.3 R26.2 R40.2
N$41: FPC1.P$6 R68.1
N$42: FPC1.P$7 R69.1
N$43: D6.4 R32.2 R54.2
N$44: FPC1.P$13 FPC1.P$14 FPC1.P$15 FPC1.P$16 FPC1.P$17 FPC1.P$18 FPC1.P$19 FPC1.P$20 FPC1.P$21 FPC1.P$22 FPC1.P$23 FPC1.P$24 FPC1.P$25 FPC1.P$26 FPC1.P$27 FPC1.P$28 FPC1.P$29 FPC1.P$30 R70.1
N$46: R56.1 U7.3
N$47: R62.1 U7.4
N$49: C12.1 C31.1 C36.1 R46.2 U7.6
N$51: J1.B5 R2.2
N$235: Q9.3 R48.1
NS_3V3: Q7.3 R45.1
NS_CTRL: R45.2 R55.1 U7.1
OTG_D+: J2.A6 J2.B6 P7.P$1 R42.2
OTG_D-: J2.A7 J2.B7 P6.P$1 R41.2
ROUT+: C33.2 FB4.2 J12.1 P30.P$1
ROUT-: C34.2 FB1.2 J12.2 P42.P$1
RTS: R3.2 U1.6 U10.1
RXD: J14.2 R60.1
RXD0_H: J10.1 P20.P$1 Q2.3 R8.1 R13.1
TFT_3V3: C13.2 C17.2 FB3.2 FPC1.P$1 FPC1.P$38 FPC1.P$39 P55.P$1 Q11.3 R67.2 R68.2 R69.2 R71.2
TFT_RST: C18.2 D1.+ FPC1.P$8 P49.P$1 R22.1
TXD: J14.1 R59.1
TXD0_H: J10.2 P19.P$1 Q1.3 R7.1 R11.1
USB_D+: J1.A6 J1.B6 P2.P$1 R4.2
USB_D-: J1.A7 J1.B7 P3.P$1 R6.2
VBAT: C4.2 J3.P$1 P9.P$1 Q3.3 R17.1 U2.3
VIN: C5.2 C9.2 C48.2 D2.- D4.- D10.- J14.3 L3.2 P11.P$1 Q3.2 R11.2 R13.2 U3.1 U3.4 U14.2
VON: FB1.1 U7.5
VOP: FB4.1 U7.8